# Altium PCB Telemetry_System.PcbDoc
Units mm, origin at the board's own origin, x right, y up, seen from the top; angles counter-clockwise.
Board outline 80 x 80 mm, 4 copper layers (Ground, Power, Ground2, Power2), stack 0.603 mm thick; 68 components, 65 nets, 309 pads, 10 vias.
Unrouted connection lines stored in the file: 180.
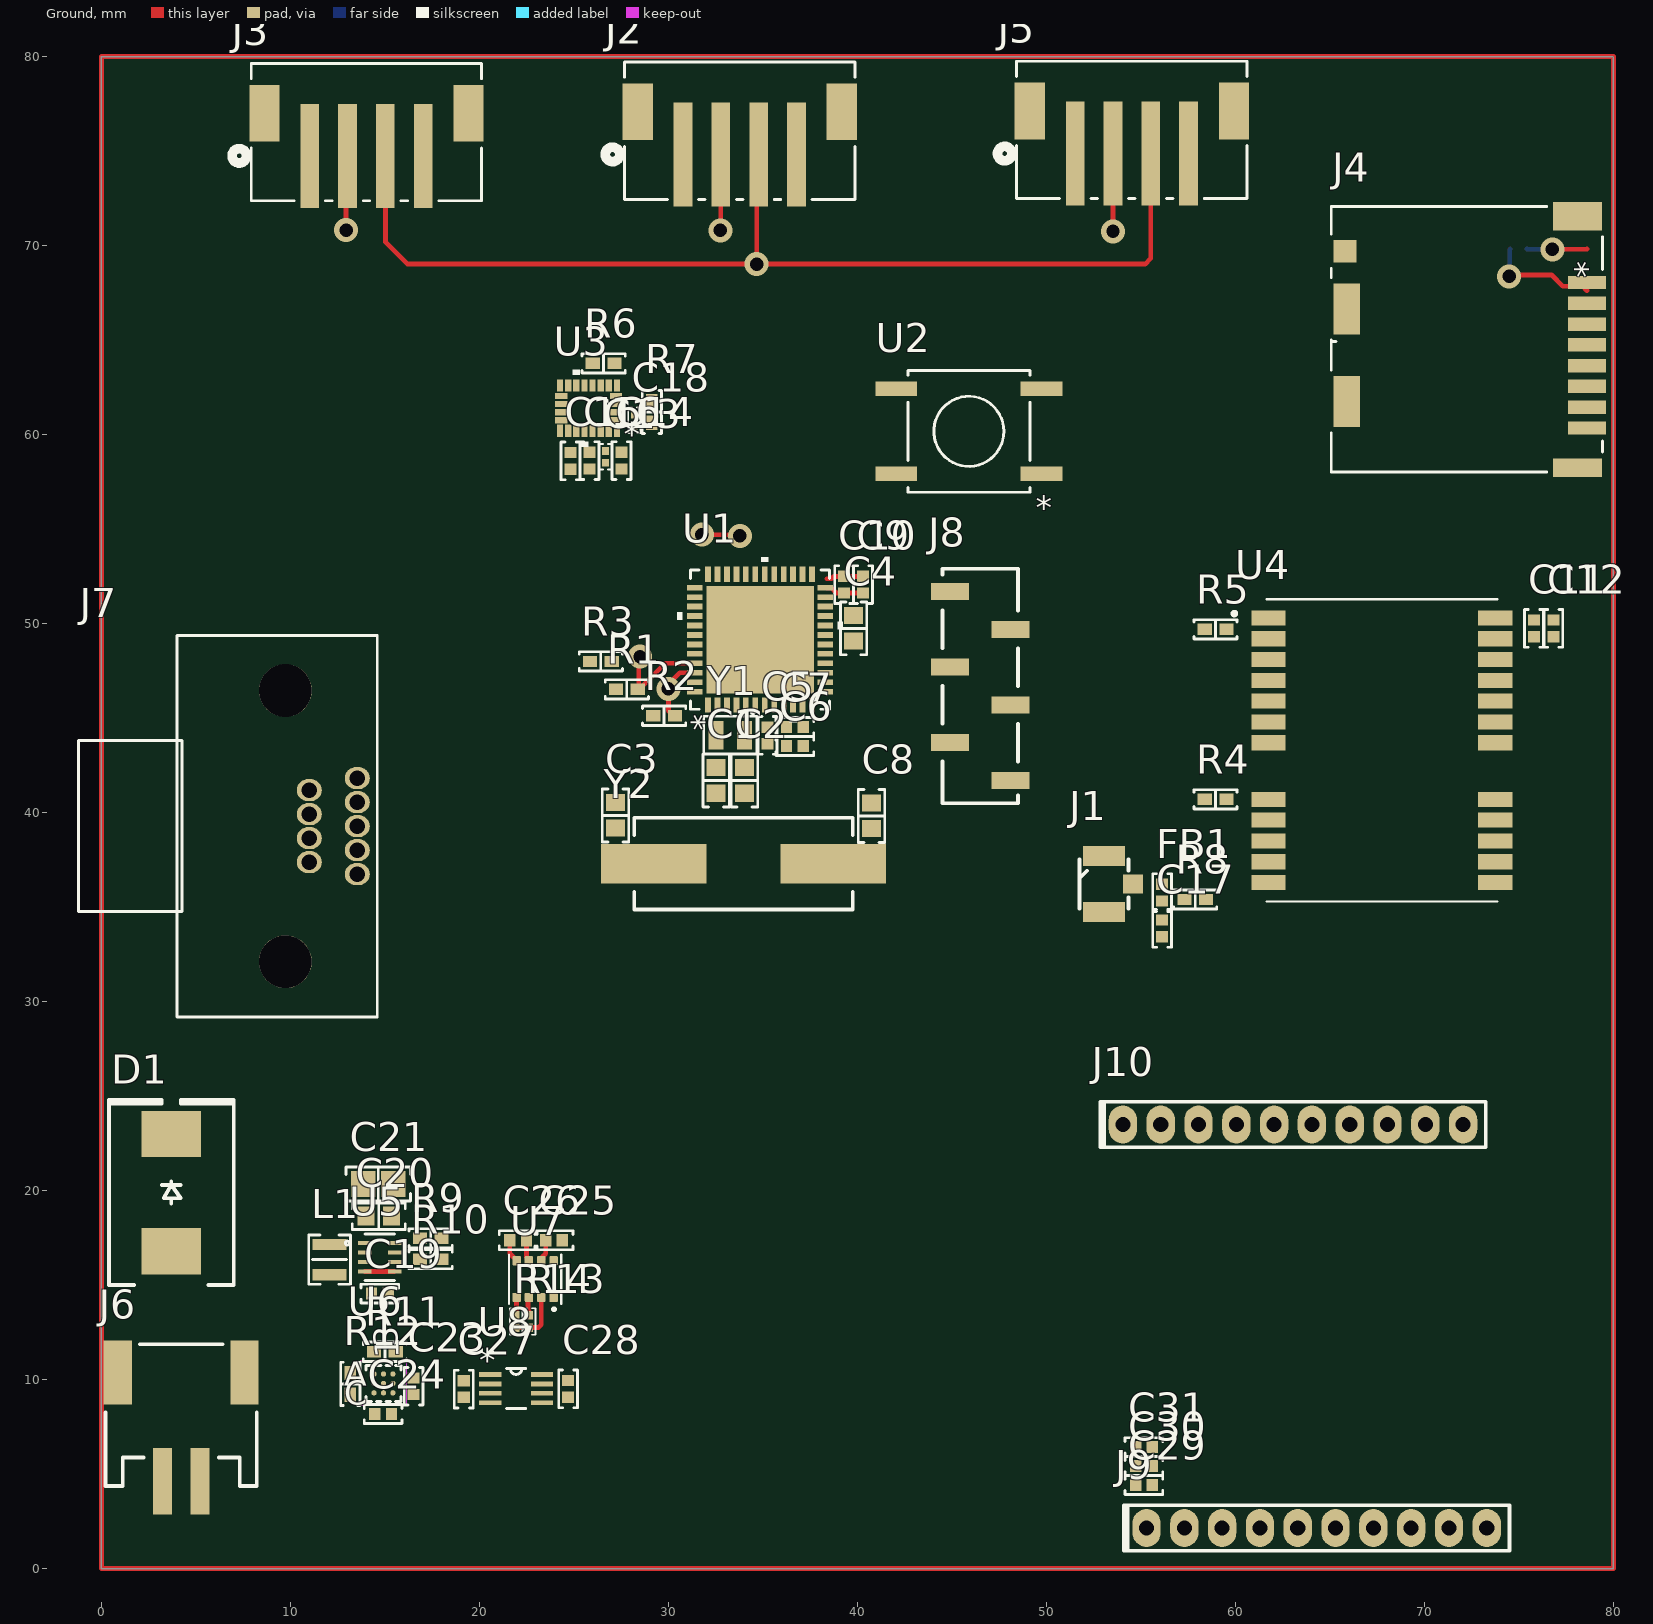
[diagram p0: Ground view]
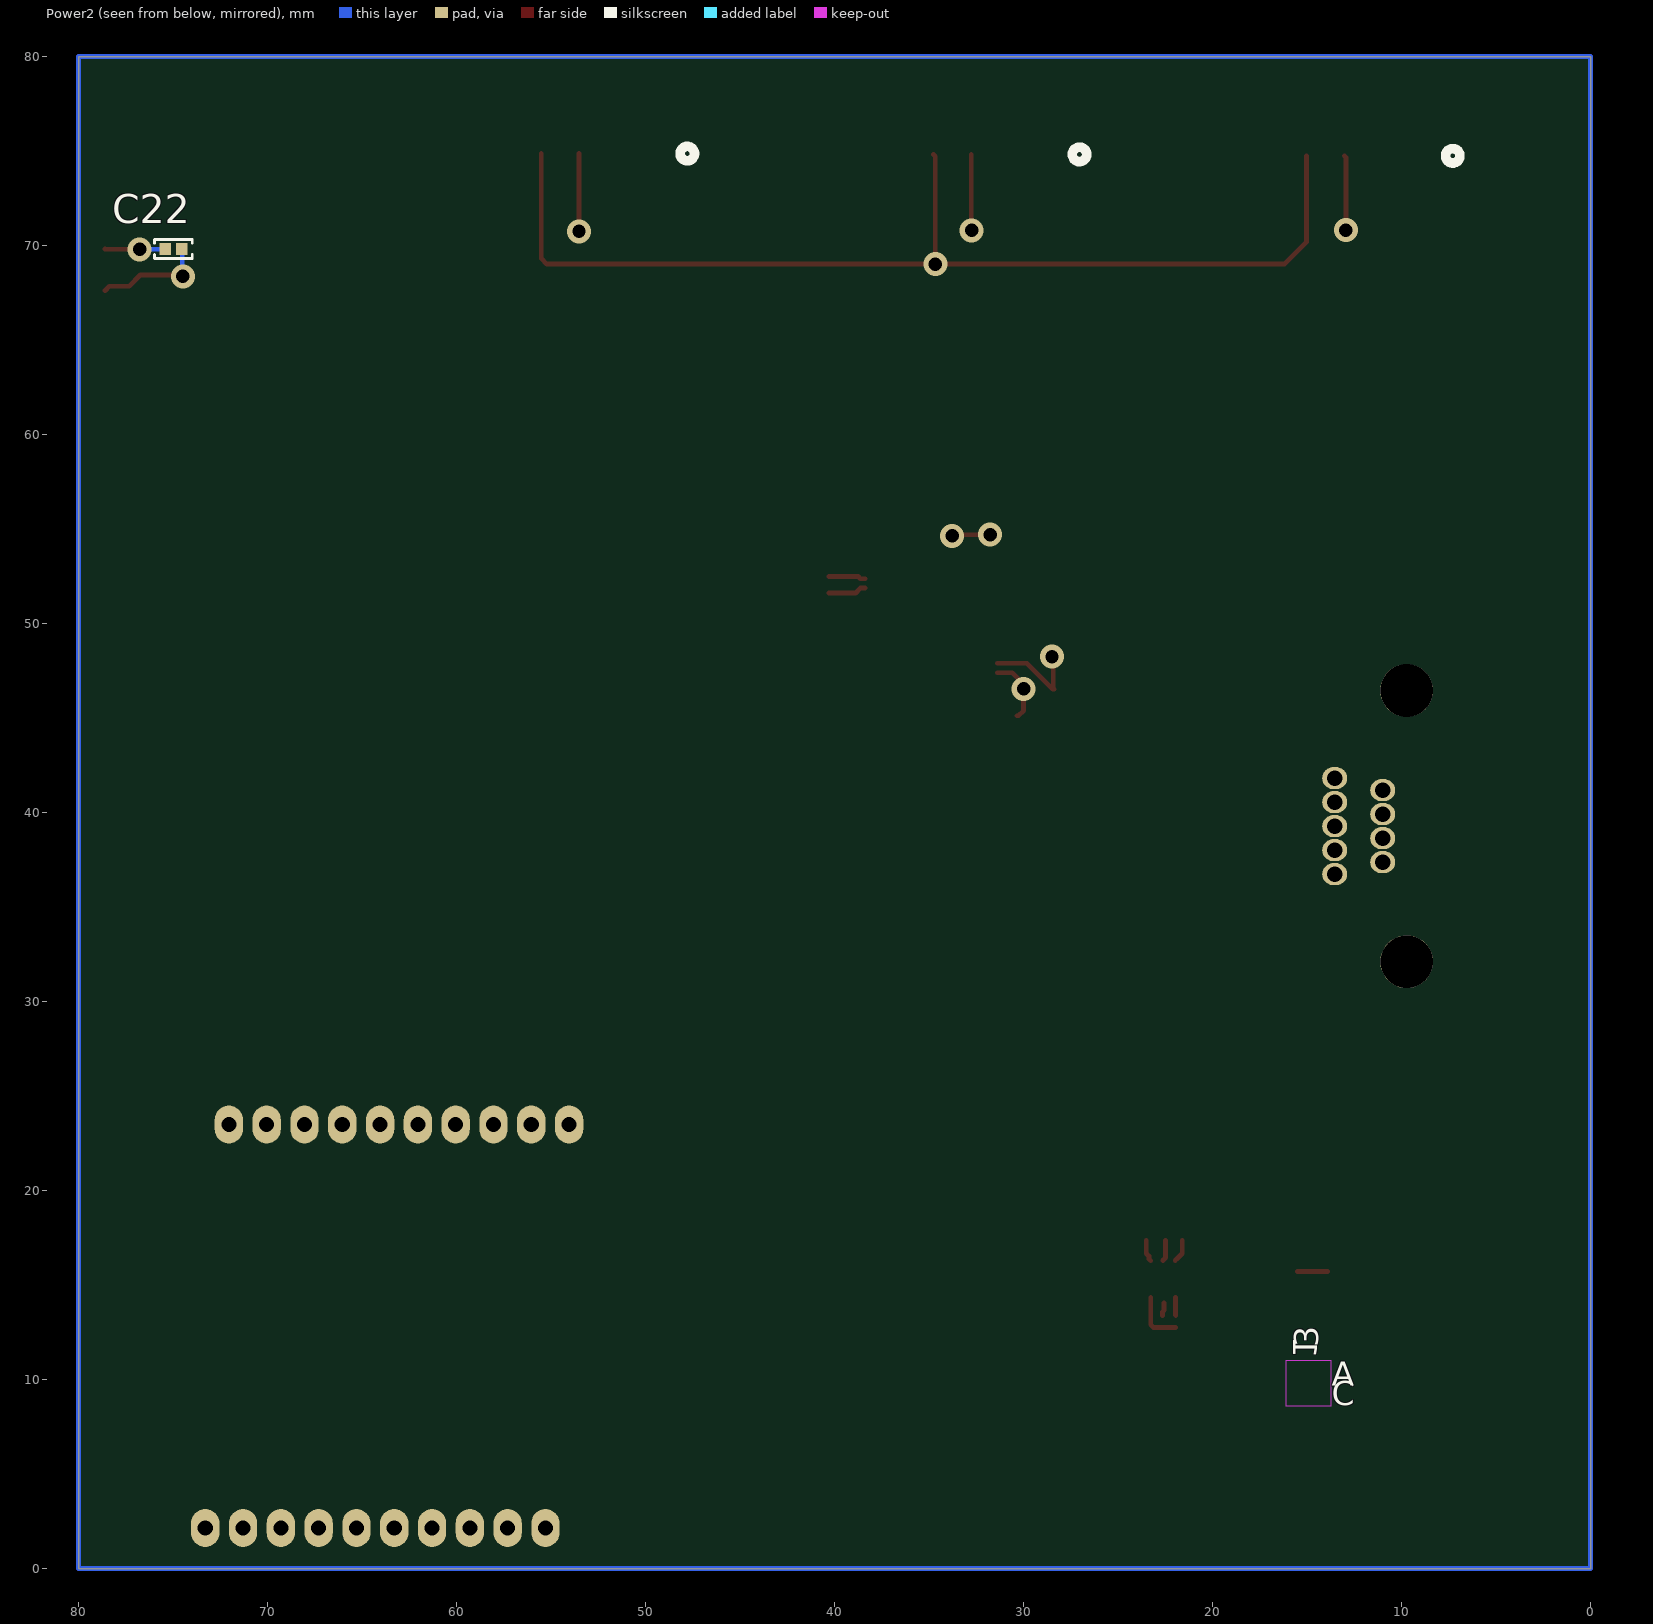
[diagram p1: Power2 view, seen from below]
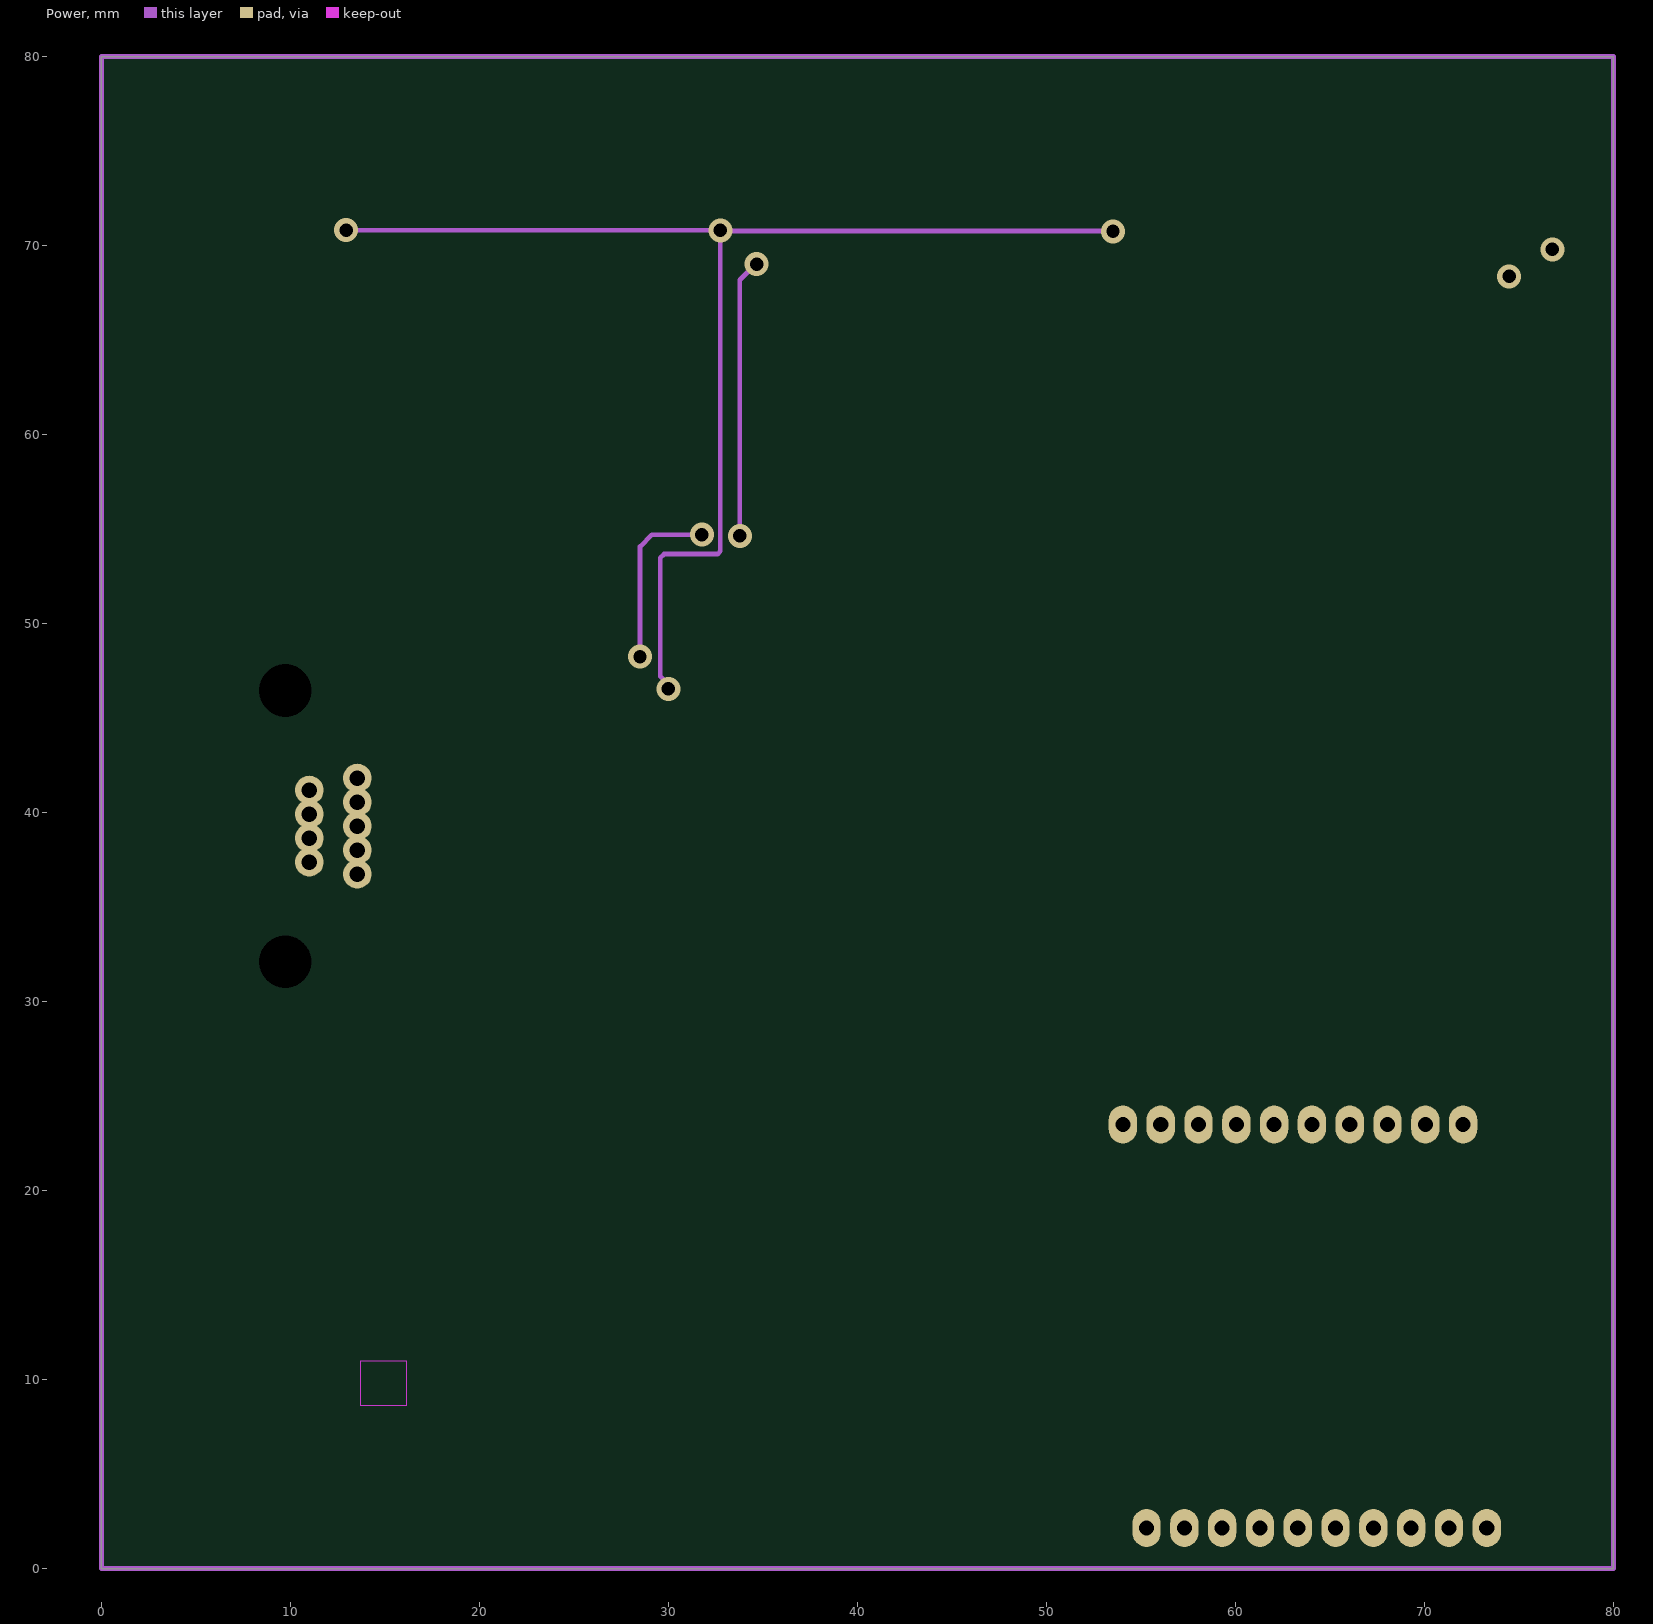
[diagram p2: Power]

## Layer stack, top to bottom
Top Solder: solder mask 0.0102, Solder Resist, Dk 3.5
Ground: signal copper 0.035
Dielectric 2: prepreg 0.0711, PP-006, Dk 4.1
Power: signal copper 0.0356
Dielectric 1: dielectric 0.32, FR-4, Dk 4.8
Ground2: signal copper 0.0356
Dielectric 3: prepreg 0.0711, PP-006, Dk 4.1
Power2: signal copper 0.035
Bottom Solder: solder mask 0.0102, Solder Resist, Dk 3.5

## Board outline
0,0 80,0 80,80 0,80

## Design rules (kind name [scope] priority, off if disabled: settings)
Clearance Clearance_1 [(ExistsOnLayer('Power') Or ExistsOnLayer('Ground2')) vs (ExistsOnLayer('Power') Or ExistsOnLayer('Ground2'))] p1: gap=0.01 ignorepadtopadclearanceinfootprint=FALSE sourcerule=37 cellrowname=All cellrowtype=0 cellcolname=All cellcoltype=0 innerlayers=TRUE
Clearance Clearance_2 [(ExistsOnLayer('Ground') Or ExistsOnLayer('Power2')) vs (ExistsOnLayer('Ground') Or ExistsOnLayer('Power2'))] p2: gap=0.01 ignorepadtopadclearanceinfootprint=FALSE sourcerule=37 cellrowname=All cellrowtype=0 cellcolname=All cellcoltype=0 outerlayers=TRUE
Clearance [All] p3: gap=0.254 ignorepadtopadclearanceinfootprint=FALSE ismatrix=TRUE
Creepage Creepage_1 [All] p1: checkdistance=0.01 applytopolygonpour=TRUE
PolygonConnect [All] p1: connectstyle=Relief reliefconductorwidth=0.254 reliefentries=4 polygonreliefangle="90 Angle" airgapwidth=0.254
RoutingVias [All] p1: holewidth=0.711 width=1.27 viastyle="Through Hole" minholewidth=0.711 minwidth=1.27 maxholewidth=0.711 maxwidth=1.27
SolderMaskExpansion [All] p1: expansion=0.102 istentingtop=FALSE
Width [All] p1: maxlimit=0.254 minlimit=0.254 preferedwidth=0.254
30 further rules are at their usual default settings.

## Classes and differential pairs
component class U_Peripherals: C11 C12 C13 C14 C15 C16 C17 C18 C19 C20 C21 C22 C23 C24 C25 C26 C27 C28 C29 C30 C31 D1 FB1 J1 J2 J3 J4 J5 J6 J7 J8 J9 J10 L1 R4 R5 R6 R7 R8 R9 R10 R11 R12 R13 R14 U3 U4 U5 U6 U7 U8
component class Telemetry_System: C1 C2 C3 C4 C5 C6 C7 C8 C9 C10 R1 R2 R3 U1 U2 Y1 Y2

## Components (designator, comment, footprint, x,y, rotation, side; value= is the part's Value field where it differs from the comment)
C1 "5 pF" "CAP 0603_1608" 32.525,41.7 r90 top
C2 "5 pF" "CAP 0603_1608" 34.025,41.7 r90 top
C3 "16 pF" "CAP 0603_1608" 27.2,39.85 r270 top
C4 "4.7 µF" "CAP 0603_1608" 39.8,49.75 r90 top
C5 "0.1 µF" "CAP 0402_1005" 35.25,44.085 r90 top
C6 "1 µF" "CAP 0402_1005" 36.69,43.525 r180 top
C7 "0.1 µF" "CAP 0402_1005" 36.69,44.525 r180 top
C8 "16 pF" "CAP 0603_1608" 40.75,39.825 r270 top
C9 "1 µF" "CAP 0402_1005" 40.3,52.06 r90 top
C10 "0.1 µF" "CAP 0402_1005" 39.3,52.06 r90 top
C11 "0.1 µF" "CAP 0402_1005" 75.8,49.75 r90 top
C12 "1 µF" "CAP 0402_1005" 76.825,49.75 r270 top
C13 "0.1 µF" "CAP 0201_0603" 26.675,58.825 r90 top
C14 "0.1 µF" "CAP 0402_1005" 27.525,58.625 r270 top
C15 "10000 pF" "CAP 0402_1005" 24.825,58.61 r90 top
C16 "10 µF" "CAP 0402_1005" 25.825,58.625 r90 top
C17 "47 pF" "CAP 0402_1005" 56.125,33.875 r90 top
C18 "0.1 µF" "CAP 0201_0603" 28.2,60.75 r90 top
C19 "22 µF" "CAP 0402_1005" 14.735,14.55 r180 top
C20 "4.7 µF" "CAP 0603_1608" 14.675,18.65 r180 top
C21 "47 µF" "CAP 0805_2012" 14.65,20.35 r180 top
C22 "0.1 µF" "CAP 0402_1005" 74.985,69.825 r0 bottom
C23 "2.2 µF" "CAP 0402_1005" 16.525,9.65 r90 top
C24 "1 µF" "CAP 0402_1005" 14.91,8.175 r0 top
C25 "0.1 µF" "CAP 0402_1005" 23.95,17.375 r0 top
C26 "0.1 µF" "CAP 0402_1005" 22.05,17.375 r0 top
C27 "0.1 µF" "CAP 0402_1005" 19.172,9.5 r90 top
C28 "0.1 µF" "CAP 0402_1005" 24.697,9.515 r270 top
C29 "47 pF" "CAP 0402_1005" 55.16,4.425 r180 top
C30 "1 µF" "CAP 0402_1005" 55.16,5.425 r180 top
C31 "10 µF" "CAP 0402_1005" 55.16,6.425 r180 top
D1 "B520C-13-F" "DO214AB SMC" 3.7,19.9 r90 top
FB1 "30 Ohms @ 100 MHz" "FER 0402_1005" 56.125,35.765 r90 top
J1 "1909763-1" "TE C-1909763" 53.05,36.225 r90 top
J2 "J_B4B-PH-SM4-TB" CONN_B4B-PH-SM4-TB_JST 33.775,76.08 r180 top
J3 "J_B4B-PH-SM4-TB" CONN_B4B-PH-SM4-TB_JST 14.025,76.005 r180 top
J4 "J_DM3CS-SF" DM3CS-SF_HIR 72.25,65.05 r90 top
J5 "J_B4B-PH-SM4-TB" CONN_B4B-PH-SM4-TB_JST 54.525,76.125 r180 top
J6 "S2B-PH-SM4-TB(LF)(SN)" "JST S2B-PH-SM4-TB" 4.225,8.875 r0 top
J7 "J_581-M09-213L462" CONN_581-M09-213L462_NRC 4.13,39.285 r90 top
J8 "NPPN061BFLD-RC" "SULLINS NPPN061BFLD-RC" 46.5,46.7 r90 top
J9 "NPPN101BFCN-RC" "SULLINS NPPN101BFCN" 64.3,2.15 r0 top locked
J10 "NPPN101BFCN-RC" "SULLINS NPPN101BFCN" 63.05,23.5 r0 top locked
L1 "1 µH" "IND 0806_2016" 12.075,16.35 r90 top
R1 "10k" "RES 0402_1005" 27.8,46.525 r0 top
R2 "10k" "RES 0402_1005" 29.775,45.125 r0 top
R3 "10k" "RES 0402_1005" 26.425,48 r180 top
R4 "10k" "RES 0402_1005" 58.95,40.7 r0 top
R5 "10k" "RES 0402_1005" 58.95,49.7 r0 top
R6 "10k" "RES 0402_1005" 26.575,63.775 r0 top
R7 "10k" "RES 0402_1005" 29.125,61.2 r90 top
R8 "10 Ohms" "RES 0402_1005" 57.875,35.4 r0 top
R9 "511 kOhms" "RES 0402_1005" 17.425,17.475 r0 top
R10 "91 kOhms" "RES 0402_1005" 17.425,16.375 r180 top
R11 "10k" "RES 0402_1005" 15,11.475 r0 top
R12 "10k" "RES 0402_1005" 13.175,9.775 r90 top
R13 "4.7k" "RES 0201_0603" 22.65,13.075 r270 top
R14 "4.7k" "RES 0201_0603" 21.95,13.075 r270 top
U1 "U_STM32F411CEU6" UFQFPN-48_7X7X0P55MM 34.85,49.15 r90 top
U2 "U_430182043816" SOIC_82043816_WRE 45.9,60.175 r180 top
U3 "U_LSM9DS1TR" LGA-24_3X3P5X1_STM 25.775,61.4 r180 top
U4 "NEO-M9N-00B" XCVR_NEO-M9N-00B 67.75,43.3 r0 top
U5 "TPS631000DRLR" TPS631000DRLR_TEX 14.725,16.475 r0 top
U6 "U_BQ27427YZFR" DSBGA9-YZF_TEX 14.925,9.8 r0 top
U7 "U_BME280" BME280 22.95,15.32 r270 top
U8 "U_TCA9406DCUR" DCU8 21.947,9.525 r0 top
Y1 "32.768 kHz" "MICRO CRYSTAL CM8V H0.6mm" 33.275,44.1 r180 top
Y2 "25 MHz" "ABRACON ABLS" 33.975,37.3 r180 top

## Footprints (in the part's own frame and the unit in brackets; to place one, negate y for a bottom-side part, rotate by r counter-clockwise, add the part's x,y. Pads: shape width x height; smd on the part's side, far side on the other; paste and mask are expansions set on the pad)
"ABRACON ABLS" [mm] "Crystal, 2-Leads, Body 4.70x11.40mm, Pitch 8.80mm, IPC Medium Density"
  rect 5.6x2.1 smd: 1(-4.75,0) 2(4.75,0)
  silkscreen extent -5.77,-2.43 5.77,2.43, body extent -6.35,-2.35 6.35,2.35, height 4.2
BME280 [mm]
  rrect25% 0.49x0.45 smd: 1(0.97,0.975) 2(0.97,0.325) 3(0.97,-0.325) 4(0.97,-0.975) 5(-0.97,-0.975) 6(-0.97,-0.325) 7(-0.97,0.325) 8(-0.97,0.975)
  silkscreen extent -1.3,-1.39 1.65,1.39
"CAP 0201_0603" [mm] "Chip Capacitor, 2-Leads, Body 0.60x0.30mm, IPC Medium Density"
  rect 0.4x0.35 smd: 1(-0.31,0) 2(0.31,0)
  silkscreen extent -0.67,-0.33 0.67,0.33, body extent -0.3,-0.15 0.3,0.15, height 0.3
"CAP 0402_1005" [mm] "Chip Capacitor, 2-Leads, Body 1.02x0.51mm, IPC Medium Density"
  rect 0.6x0.64 smd: 1(-0.44,0) 2(0.44,0)
  silkscreen extent -1,-0.5 1,0.5, body extent -0.5,-0.26 0.5,0.26, height 0.52
"CAP 0603_1608" [mm] "Chip Capacitor, 2-Leads, Body 1.60x0.80mm, IPC Medium Density"
  rect 0.9x1 smd: 1(-0.675,0) 2(0.675,0)
  silkscreen extent -1.4,-0.7 1.4,0.7, body extent -0.8,-0.41 0.8,0.41, height 0.82
"CAP 0805_2012" [mm] "Chip Capacitor, 2-Leads, Body 2.00x1.20mm, IPC Medium Density"
  rect 1.3x1.4 smd: 1(-0.8,0) 2(0.8,0)
  silkscreen extent -1.7,-0.9 1.7,0.9, body extent -1,-0.64 1,0.64, height 1.26
CONN_581-M09-213L462_NRC [mil]
  oval 46x52 / inner round 60 / far side oval 46x52 hole 32 paste-99999 mask+0: 1(-100,-370.47) 2(-50,-370.47) 3(0,-370.47) 4(50,-370.47) 5(100,-370.47) 6(-75,-270.47) 7(-25,-270.47) 8(25,-270.47) 9(75,-270.47)
  round 110 / inner round 60 / far side round 110 hole 110 unplated paste-99999 mask-55: 10(-282.48,-220.47) 11(282.48,-220.47)
  silkscreen extent -398,-412 398,210, body extent -393,-438 393,174, height 307
CONN_B4B-PH-SM4-TB_JST [mil]
  rect 39x217 smd paste+0 mask+0: 1(118.11,49.42) 2(39.37,49.42) 3(-39.37,49.42) 4(-118.11,49.42)
  rect 63x118 smd paste-59 mask-59: 5(-212.6,-39.17) 6(212.6,-39.17)
  silkscreen extent -240,-143 280,143, body extent -243,-128 228,148, height 266
DCU8 [mil]
  rect 46x10 smd paste-23 mask-23: 1(-54,29.53) 2(-54,9.84) 3(-54,-9.84) 4(-54,-29.53) 5(54,-29.53) 6(54,-9.84) 7(54,9.84) 8(54,29.53)
  silkscreen extent -20,-42 20,42, body extent -63,-41 63,41, height 35
DM3CS-SF_HIR [mil]
  rect 28x79 smd paste+0 mask+0: 1(118.11,-250.06) 2(74.8,-250.06) 3(31.5,-250.06) 4(-11.81,-250.06) 5(-55.12,-250.06) 6(-98.43,-250.06) 7(-141.73,-250.06) 8(-185.04,-250.06)
  rect 106x55 smd paste+0 mask+0: 9(62.99,249.94) 11(-129.92,249.94)
  rect 39x102 smd paste+0 mask+0: 10(-267.72,-230.37)
  rect 47x47 smd paste+0 mask+0: 12(183.07,253.88)
  rect 59x102 smd paste-51 mask-51: 13(255.91,-230.37)
  silkscreen extent -276,-282 276,282, body extent -272,-283 272,273, height 84
"DO214AB SMC" [mm] "Molded Diode, 2-Leads, Body 6.85x5.90mm, IPC Medium Density"
  rect 2.45x3.15 smd: 1(-3.1,0) 2(3.1,0)
  silkscreen extent -4.9,-3.3 4.9,3.3, body extent -3.97,-2.95 3.97,2.95, height 2.6
DSBGA9-YZF_TEX [mil]
  round 11 smd paste+0 mask+0: A1(-19.69,19.69) A2(0,19.69) A3(19.69,19.69) B1(-19.69,0) B2(0,0) B3(19.69,0) C1(-19.69,-19.69) C2(0,-19.69) C3(19.69,-19.69)
  Keep-Out Layer region: -47.04,-47.04 -47.04,47.03 47.03,47.03 47.03,-47.04
  silkscreen extent -36,-38 36,38, body extent -31,-33 31,33, height 25
"FER 0402_1005" [mm] "Chip Ferrite, 2-Leads, Body 1.02x0.51mm, IPC Medium Density"
  rect 0.6x0.64 smd: 1(-0.44,0) 2(0.44,0)
  silkscreen extent -1,-0.5 1,0.5, body extent -0.5,-0.26 0.5,0.26, height 0.52
"IND 0806_2016" [mm] "Chip Capacitor, 2-Leads, Body 2.00x1.20mm, IPC Medium Density"
  rect 0.6x1.8 smd: 1(-0.8,0) 2(0.8,0)
  silkscreen extent -1.3,-1.1 1.3,1.1, body extent -1.01,-0.91 1.01,0.91, height 1.81
"JST S2B-PH-SM4-TB" [mm] "JST PH Series 2mm pitch, side entry connector"
  rect 1x3.5 smd: 1(-1,-4.25) 2(1,-4.25)
  rect 1.5x3.4 smd: M(-3.35,1.5) M(3.35,1.5)
  silkscreen extent -4,-4.5 4,3, body extent -3.95,-5.6 3.95,3.01, height 5.6
LGA-24_3X3P5X1_STM [mm]
  rect 0.331x0.654 smd paste-0.065 mask+0.051: 1(-1.505,1.2) 6(-1.505,-1.2) 7(-1.075,-1.2) 8(-0.645,-1.2) 9(-0.215,-1.2) 10(0.215,-1.2) 11(0.645,-1.2) 12(1.075,-1.2) 13(1.505,-1.2) 18(1.505,1.2) 19(1.075,1.2) 20(0.645,1.2) 21(0.215,1.2) 22(-0.215,1.2) 23(-0.645,1.2) 24(-1.075,1.2)
  rect 0.654x0.331 smd paste-0.065 mask+0.051: 2(-1.45,0.645) 3(-1.45,0.215) 4(-1.45,-0.215) 5(-1.45,-0.645) 14(1.45,-0.645) 15(1.45,-0.215) 16(1.45,0.215) 17(1.45,0.645)
  silkscreen extent 0.02,-2.03 0.84,2.03, body extent -1.75,-1.5 1.75,1.5, height 1.65
"MICRO CRYSTAL CM8V H0.6mm" [mm] "SMD Crystal 2.0 x 1.2 x 0.6mm"
  rect 0.8x1.5 smd: 1(-0.75,0) 2(0.75,0)
  silkscreen extent -1.4,-1.25 1.4,1, body extent -1,-0.6 1,0.6, height 0.6
"RES 0201_0603" [mm] "Chip Resistor, 2-Leads, Body 0.60x0.30mm, IPC Medium Density"
  rect 0.44x0.35 smd: 1(-0.325,0) 2(0.325,0)
  silkscreen extent -0.7,-0.33 0.7,0.33, body extent -0.3,-0.15 0.3,0.15, height 0.21
"RES 0402_1005" [mm] "Chip Resistor, 2-Leads, Body 1.0x0.5mm, IPC Medium Density"
  rect 0.75x0.6 smd: 1(-0.575,0) 2(0.575,0)
  silkscreen extent -1.14,-0.51 1.14,0.51, body extent -0.5,-0.25 0.5,0.25, height 0.35
SOIC_82043816_WRE [mil]
  rect 87x30 smd paste+0 mask+0: 1(-151.5,88.58) 2(-151.5,-88.58) 3(151.5,-88.58) 4(151.5,88.58)
  silkscreen extent -127,-127 127,127, body extent -182,-122 172,122, height 169
"SULLINS NPPN061BFLD-RC" [mm] "6 Position Header Connector 0.079\" (2.00mm) Surface Mount Gold"
  rect 0.9x2 smd: 1(-5,-1.6) 2(-3,1.6) 3(-1,-1.6) 4(1,1.6) 5(3,-1.6) 6(5,1.6)
  silkscreen extent -6.2,-2 6.2,2, body extent -6.25,-2 6.25,2, height 4.6
"SULLINS NPPN101BFCN" [mm]
  oval 1.5x2 hole 0.8: 1(-9,0) 2(-7,0) 3(-5,0) 4(-3,0) 5(-1,0) 6(1,0) 7(3,0) 8(5,0) 9(7,0) 10(9,0)
  silkscreen extent -10.2,-1.2 10.2,1.2, body extent -10.25,-1.2 10.25,1.2, height 4.41
"TE C-1909763" [mm]
  rect 1.05x2.2 smd: G(-1.475,0) G(1.475,0)
  rect 1x1.05 smd: S(0,-1.525)
  silkscreen extent -1.3,-1.3 1.3,1.3, body extent -1.5,-1.55 1.5,1.55, height 1.23
TPS631000DRLR_TEX [mil]
  rect 28x9 smd paste+0 mask+0: 1(-31.5,29.53) 2(-31.5,9.84) 3(-31.5,-9.84) 4(-31.5,-29.53) 5(31.5,-29.53) 6(31.5,-9.84) 7(31.5,9.84) 8(31.5,29.53)
  silkscreen extent -71,-48 30,48, body extent -34,-44 34,44, height 27
UFQFPN-48_7X7X0P55MM [mil]
  rect 32x12 smd paste+0 mask+0: 1(-136,108.27) 2(-136,88.58) 3(-136,68.9) 4(-136,49.21) 5(-136,29.53) 6(-136,9.84) 7(-136,-9.84) 8(-136,-29.53) 9(-136,-49.21) 10(-136,-68.9) 11(-136,-88.58) 12(-136,-108.27) 25(136,-108.27) 26(136,-88.58) 27(136,-68.9) 28(136,-49.21) 29(136,-29.53) 30(136,-9.84) 31(136,9.84) 32(136,29.53) 33(136,49.21) 34(136,68.9) 35(136,88.58) 36(136,108.27)
  rect 12x32 smd paste+0 mask+0: 13(-108.27,-136) 14(-88.58,-136) 15(-68.9,-136) 16(-49.21,-136) 17(-29.53,-136) 18(-9.84,-136) 19(9.84,-136) 20(29.53,-136) 21(49.21,-136) 22(68.9,-136) 23(88.58,-136) 24(108.27,-136) 37(108.27,136) 38(88.58,136) 39(68.9,136) 40(49.21,136) 41(29.53,136) 42(9.84,136) 43(-9.84,136) 44(-29.53,136) 45(-49.21,136) 46(-68.9,136) 47(-88.58,136) 48(-108.27,136)
  rect 224x224 smd paste-112 mask+0: 49(0,0)
  silkscreen extent -172,-172 172,172, body extent -140,-141 140,139, height 24
XCVR_NEO-M9N-00B [mm]
  rect 1.8x0.8 smd paste-2: 1(-6,7) 2(-6,5.9) 3(-6,4.8) 4(-6,3.7) 5(-6,2.6) 6(-6,1.5) 7(-6,0.4) 8(-6,-2.6) 9(-6,-3.7) 10(-6,-4.8) 11(-6,-5.9) 12(-6,-7) 13(6,-7) 14(6,-5.9) 15(6,-4.8) 16(6,-3.7) 17(6,-2.6) 18(6,0.4) 19(6,1.5) 20(6,2.6) 21(6,3.7) 22(6,4.8) 23(6,5.9) 24(6,7)
  silkscreen extent -7.9,-8 6.1,8, body extent -5.97,-8 6.23,8, height 2.6

## Part data
C1 C2: library part CGA3E2C0G1H050C080AD, "CAP CER 5PF 50V 0603 EPOXY", Device Package="0603 (1608 Metric)", manufacturer="TDK Corporation", Operating Temperature="-55°C ~ 125°C", Ratings=AEC-Q200, Supplier Part Number 1=445-9797-1-ND, Temperature Coefficient="C0G, NP0", Tolerance=±0.25pF, Voltage - Rated=50V, Applications=Automotive, Capacitance="5 pF", ComponentLink1Description=Datasheet, ComponentLink1URL=https://product.tdk.com/info/en/catalog/datasheets/mlcc_automotive_epoxy_en.pdf?ref_disty=digikey, ComponentLink2Description="DigiKey Link", ComponentLink2URL=https://www.digikey.com/en/products/detail/tdk-corporation/CGA3E2C0G1H050C080AD/3933530, Features="Epoxy Mountable", lastupdated="9/02/2024 8:10:25 PM", Lifecycle Status=Active, Minimum Order=1, Mounting Type="Surface Mount, MLCC, Epoxy", Package / Case="0603 (1608 Metric)", packaging=TapeAndReel, Part Number=CGA3E2C0G1H050C080AD, Part Status=Active, partid=6295, price=0.02, series=CGA, Size / Dimension="0.063\" L x 0.031\" W (1.60mm x 0.80mm)", Supplier 1=DigiKey, Thickness (Max)="0.037\" (0.95mm)"
C3 C8: library part C0603C160K3GAC7867, "CAP CER 16PF 25V C0G/NP0 0603", Device Package="0603 (1608 Metric)", manufacturer=KEMET, Operating Temperature="-55°C ~ 125°C", Supplier Part Number 1=399-C0603C160K3GAC7867CT-ND, Temperature Coefficient="C0G, NP0", Tolerance=±10%, Voltage - Rated=25V, Applications="General Purpose", Capacitance="16 pF", ComponentLink1Description=Datasheet, ComponentLink1URL=https://api.kemet.com/component-edge/download/datasheet/C0603C160K3GAC7867.pdf, ComponentLink2Description="DigiKey Link", ComponentLink2URL=https://www.digikey.com/en/products/detail/kemet/C0603C160K3GAC7867/12701360, Features="Low ESL", lastupdated="9/02/2024 8:09:58 PM", Lifecycle Status=Active, Minimum Order=1, Mounting Type="Surface Mount, MLCC", Package / Case="0603 (1608 Metric)", packaging=TapeAndReel, Part Number=C0603C160K3GAC7867, Part Status=Active, partid=35523, price=0.04, series="SMD Comm C0G", Size / Dimension="0.063\" L x 0.031\" W (1.60mm x 0.80mm)", Supplier 1=DigiKey, Thickness (Max)="0.034\" (0.87mm)"
C4 C20: library part GRM185C80J475ME11D, "CAP CER 4.7UF 6.3V X6S 0603", Device Package="0603 (1608 Metric)", manufacturer="Murata Electronics", Operating Temperature="-55°C ~ 105°C", Supplier Part Number 1=490-18660-1-ND, Temperature Coefficient=X6S, Tolerance=±20%, Voltage - Rated=6.3V, Applications="General Purpose", Capacitance="4.7 µF", ComponentLink1Description=Datasheet, ComponentLink1URL=https://search.murata.co.jp/Ceramy/image/img/A01X/G101/ENG/GRM185C80J475ME11-01A.pdf, ComponentLink2Description="DigiKey Link", ComponentLink2URL=https://www.digikey.com/en/products/detail/murata-electronics/GRM185C80J475ME11D/10326313, lastupdated="9/02/2024 8:10:28 PM", Lifecycle Status=Active, Minimum Order=1, Mounting Type="Surface Mount, MLCC", Package / Case="0603 (1608 Metric)", packaging=TapeAndReel, Part Number=GRM185C80J475ME11D, Part Status=Active, partid=3976, price=0.03, series=GRM, Size / Dimension="0.063\" L x 0.031\" W (1.60mm x 0.80mm)", Supplier 1=DigiKey, Thickness (Max)="0.022\" (0.55mm)"
C5 C7 C10 C11 C14 C22 C25 C26 C27 C28: library part CL05B104KP5VPNC, "CAP CER 100NF 10V X7R 0402", Device Package="0402 (1005 Metric)", manufacturer="Samsung Electro-Mechanics", Operating Temperature="-55°C ~ 125°C", Ratings=AEC-Q200, Supplier Part Number 1=1276-CL05B104KP5VPNCCT-ND, Temperature Coefficient=X7R, Tolerance=±10%, Voltage - Rated=10V, Applications=Automotive, Capacitance="0.1 µF", ComponentLink1Description=Datasheet, ComponentLink1URL=https://mm.digikey.com/Volume0/opasdata/d220001/medias/docus/5458/CL05B104KP5VPNC_Spec.pdf, ComponentLink2Description="DigiKey Link", ComponentLink2URL=https://www.digikey.com/en/products/detail/samsung-electro-mechanics/CL05B104KP5VPNC/20498482, lastupdated="9/02/2024 8:03:17 PM", Lifecycle Status=Active, Minimum Order=1, Mounting Type="Surface Mount, MLCC", Package / Case="0402 (1005 Metric)", packaging=TapeAndReel, Part Number=CL05B104KP5VPNC, partid=56690, price=0.01, series=CL, Size / Dimension="0.039\" L x 0.020\" W (1.00mm x 0.50mm)", Supplier 1=DigiKey, Thickness (Max)="0.022\" (0.55mm)"
C6 C9 C12 C24 C30: library part KGM05AR50G105KH, "CAP CER 1UF 4V X5R 0402", Device Package="0402 (1005 Metric)", manufacturer="KYOCERA AVX", Operating Temperature="-55°C ~ 85°C", Supplier Part Number 1=478-KGM05AR50G105KHCT-ND, Temperature Coefficient=X5R, Tolerance=±10%, Voltage - Rated=4V, Applications="General Purpose", Capacitance="1 µF", ComponentLink1Description=Datasheet, ComponentLink1URL=https://datasheets.kyocera-avx.com/cx5r.pdf, ComponentLink2Description="DigiKey Link", ComponentLink2URL=https://www.digikey.com/en/products/detail/kyocera-avx/KGM05AR50G105KH/3079858, lastupdated="9/02/2024 8:03:45 PM", Lifecycle Status=Active, Minimum Order=1, Mounting Type="Surface Mount, MLCC", Package / Case="0402 (1005 Metric)", packaging=TapeAndReel, Part Number=KGM05AR50G105KH, Part Status=Active, partid=51052, price=0.07, series="KGM - X5R", Size / Dimension="0.039\" L x 0.020\" W (1.00mm x 0.50mm)", Supplier 1=DigiKey, Thickness (Max)="0.022\" (0.55mm)"
C13 C18: library part 02016C104KAT2A, "0201 6.3V X7R 100NF 10%", Device Package="0201 (0603 Metric)", manufacturer="KYOCERA AVX", Operating Temperature="-55°C ~ 125°C", Supplier Part Number 1=478-02016C104KAT2ACT-ND, Temperature Coefficient=X7R, Tolerance=±10%, Voltage - Rated=6.3V, Applications="General Purpose", Capacitance="0.1 µF", ComponentLink1Description=Datasheet, ComponentLink1URL=https://datasheets.kyocera-avx.com/X7RDielectric.pdf, ComponentLink2Description="DigiKey Link", ComponentLink2URL=https://www.digikey.com/en/products/detail/kyocera-avx/02016C104KAT2A/17868582, lastupdated="11/03/2024 7:01:34 AM", Lifecycle Status=Active, Minimum Order=1, Mounting Type="Surface Mount, MLCC", Package / Case="0201 (0603 Metric)", packaging=TapeAndReel, Part Number=02016C104KAT2A, Part Status=Active, partid=47559, price=0.06, series=-, Size / Dimension="0.024\" L x 0.012\" W (0.60mm x 0.30mm)", Supplier 1=DigiKey, Thickness (Max)="0.013\" (0.33mm)"
C15: library part C0402C103K4REC7867, "CAP CER 0402 10NF 16V X7R 10%", Device Package="0402 (1005 Metric)", manufacturer=KEMET, Operating Temperature="-55°C ~ 125°C", Supplier Part Number 1=399-C0402C103K4REC7867CT-ND, Temperature Coefficient=X7R, Tolerance=±10%, Voltage - Rated=16V, Applications="ESD Protection", Capacitance="10000 pF", ComponentLink1Description=Datasheet, ComponentLink1URL=https://connect.kemet.com:7667/gateway/IntelliData-ComponentDocumentation/1.0/download/datasheet/C0402C103K4REC7867, ComponentLink2Description="DigiKey Link", ComponentLink2URL=https://www.digikey.com/en/products/detail/kemet/C0402C103K4REC7867/8643577, lastupdated="9/02/2024 8:03:43 PM", Lifecycle Status=Active, Minimum Order=1, Mounting Type="Surface Mount, MLCC", Package / Case="0402 (1005 Metric)", packaging=TapeAndReel, Part Number=C0402C103K4REC7867, Part Status=Active, partid=52124, price=0.01, series="ESD SMD Comm X7R", Size / Dimension="0.039\" L x 0.020\" W (1.00mm x 0.50mm)", Supplier 1=DigiKey, Thickness (Max)="0.022\" (0.55mm)"
C16: library part GRM155R60G106ME01D, "CAP CER 10UF 4V X5R 0402", Device Package="0402 (1005 Metric)", manufacturer="Murata Electronics", Operating Temperature="-55°C ~ 85°C", Supplier Part Number 1=490-GRM155R60G106ME01DCT-ND, Temperature Coefficient=X5R, Tolerance=±20%, Voltage - Rated=4V, Applications="General Purpose", Capacitance="10 µF", ComponentLink1Description=Datasheet, ComponentLink1URL=https://search.murata.co.jp/Ceramy/image/img/A01X/G101/ENG/GRM155R60G106ME01-01A.pdf, ComponentLink2Description="DigiKey Link", ComponentLink2URL=https://www.digikey.com/en/products/detail/murata-electronics/GRM155R60G106ME01D/13688572, lastupdated="9/02/2024 8:03:59 PM", Lifecycle Status=Active, Minimum Order=1, Mounting Type="Surface Mount, MLCC", Package / Case="0402 (1005 Metric)", packaging=TapeAndReel, Part Number=GRM155R60G106ME01D, Part Status=Active, partid=48095, price=0.01, series=GRM, Size / Dimension="0.039\" L x 0.020\" W (1.00mm x 0.50mm)", Supplier 1=DigiKey, Thickness (Max)="0.026\" (0.65mm)"
C17 C29: library part C0402C470J4GAC7867, "CAP CER 47PF 16V NP0 0402", Device Package="0402 (1005 Metric)", manufacturer=KEMET, Operating Temperature="-55°C ~ 125°C", Supplier Part Number 1=399-14453-1-ND, Temperature Coefficient="C0G, NP0", Tolerance=±5%, Voltage - Rated=16V, Applications="General Purpose", Capacitance="47 pF", ComponentLink1Description=Datasheet, ComponentLink1URL=https://api.kemet.com/component-edge/download/datasheet/C0402C470J4GACTU.pdf, ComponentLink2Description="DigiKey Link", ComponentLink2URL=https://www.digikey.com/en/products/detail/kemet/C0402C470J4GAC7867/2196712, Features="Low ESL", lastupdated="9/02/2024 8:04:38 PM", Lifecycle Status=Active, Minimum Order=1, Mounting Type="Surface Mount, MLCC", Package / Case="0402 (1005 Metric)", packaging=TapeAndReel, Part Number=C0402C470J4GAC7867, Part Status=Active, partid=1744, price=0.05, series="SMD Comm C0G", Size / Dimension="0.039\" L x 0.020\" W (1.00mm x 0.50mm)", Supplier 1=DigiKey, Thickness (Max)="0.022\" (0.55mm)"
C19: library part GRM158R61A226ME15D, "CAP CER 22UF 10V X5R 0402", Device Package="0402 (1005 Metric)", manufacturer="Murata Electronics", Operating Temperature="-55°C ~ 85°C", Supplier Part Number 1=490-GRM158R61A226ME15DCT-ND, Temperature Coefficient=X5R, Tolerance=±20%, Voltage - Rated=10V, Applications="General Purpose", Capacitance="22 µF", ComponentLink1Description=Datasheet, ComponentLink1URL=https://search.murata.co.jp/Ceramy/image/img/A01X/G101/ENG/GRM158R61A226ME15-01A.pdf, ComponentLink2Description="DigiKey Link", ComponentLink2URL=https://www.digikey.com/en/products/detail/murata-electronics/GRM158R61A226ME15D/16033379, lastupdated="9/02/2024 8:04:08 PM", Lifecycle Status=Active, Minimum Order=1, Mounting Type="Surface Mount, MLCC", Package / Case="0402 (1005 Metric)", packaging=TapeAndReel, Part Number=GRM158R61A226ME15D, Part Status=Active, partid=44973, price=0.08, series=GRM, Size / Dimension="0.039\" L x 0.020\" W (1.00mm x 0.50mm)", Supplier 1=DigiKey, Thickness (Max)="0.031\" (0.80mm)"
C21: library part AMK212BBJ476MD-T, "CAP CER 47UF 4V X5R 0805", Device Package="0805 (2012 Metric)", manufacturer="Taiyo Yuden", Operating Temperature="-55°C ~ 85°C", Supplier Part Number 1=587-5399-1-ND, Temperature Coefficient=X5R, Tolerance=±20%, Voltage - Rated=4V, Applications="SMPS Filtering", Capacitance="47 µF", ComponentLink1Description=Datasheet, ComponentLink1URL="https://ds.yuden.co.jp/TYCOMPAS/ut/detail?pn=AMK212BBJ476MD-T &u=M", ComponentLink2Description="DigiKey Link", ComponentLink2URL=https://www.digikey.com/en/products/detail/taiyo-yuden/AMK212BBJ476MD-T/7066986, lastupdated="9/02/2024 8:16:07 PM", Lifecycle Status=Active, Minimum Order=1, Mounting Type="Surface Mount, MLCC", Package / Case="0805 (2012 Metric)", packaging=TapeAndReel, Part Number=AMK212BBJ476MD-T, Part Status=Active, partid=3321, price=0.12, series=M, Size / Dimension="0.079\" L x 0.049\" W (2.00mm x 1.25mm)", Supplier 1=DigiKey, Thickness (Max)="0.037\" (0.95mm)"
C23: library part GRM155R6YA225KE11D, "CAP CER 2.2UF 35V X5R 0402", Device Package="0402 (1005 Metric)", manufacturer="Murata Electronics", Operating Temperature="-55°C ~ 85°C", Supplier Part Number 1=490-18212-1-ND, Temperature Coefficient=X5R, Tolerance=±10%, Voltage - Rated=35V, Applications="General Purpose", Capacitance="2.2 µF", ComponentLink1Description=Datasheet, ComponentLink1URL=https://search.murata.co.jp/Ceramy/image/img/A01X/G101/ENG/GRM155R6YA225KE11-01.pdf, ComponentLink2Description="DigiKey Link", ComponentLink2URL=https://www.digikey.com/en/products/detail/murata-electronics/GRM155R6YA225KE11D/9867920, lastupdated="9/02/2024 8:04:37 PM", Lifecycle Status=Active, Minimum Order=1, Mounting Type="Surface Mount, MLCC", Package / Case="0402 (1005 Metric)", packaging=TapeAndReel, Part Number=GRM155R6YA225KE11D, Part Status=Active, partid=1989, price=0.03, series=GRM, Size / Dimension="0.039\" L x 0.020\" W (1.00mm x 0.50mm)", Supplier 1=DigiKey, Thickness (Max)="0.028\" (0.70mm)"
C31: library part CL05A106MP8NUB8, "CAP CER 10UF 10V X5R 0402", Device Package="0402 (1005 Metric)", manufacturer="Samsung Electro-Mechanics", Operating Temperature="-55°C ~ 85°C", Supplier Part Number 1=1276-6830-1-ND, Temperature Coefficient=X5R, Tolerance=±20%, Voltage - Rated=10V, Applications="Acoustic Noise Reduction", Capacitance="10 µF", ComponentLink1Description=Datasheet, ComponentLink1URL=http://www.samsungsem.com/kr/support/product-search/mlcc/CL05A106MP8NUB8.jsp, ComponentLink2Description="DigiKey Link", ComponentLink2URL=https://www.digikey.com/en/products/detail/samsung-electro-mechanics/CL05A106MP8NUB8/5961314, lastupdated="9/02/2024 8:04:38 PM", Lifecycle Status=Active, Minimum Order=1, Mounting Type="Surface Mount, MLCC", Package / Case="0402 (1005 Metric)", packaging=TapeAndReel, Part Number=CL05A106MP8NUB8, Part Status=Active, partid=1758, price=0.06, series=CL, Size / Dimension="0.039\" L x 0.020\" W (1.00mm x 0.50mm)", Supplier 1=DigiKey, Thickness (Max)="0.035\" (0.90mm)"
D1: "DIODE SCHOTTKY 20V 5A SMC", Capacitance @ Vr, F="300pF @ 4V, 1MHz", Current - Average Rectified (Io)=5A, Current - Reverse Leakage @ Vr="500 µA @ 20 V", manufacturer="Diodes Incorporated", Operating Temperature - Junction="-55°C ~ 150°C", Package / Case="DO-214AB, SMC", Supplier Device Package=SMC, Supplier Part Number 1=B520C-FDICT-ND, Voltage - DC Reverse (Vr) (Max)="20 V", Voltage - Forward (Vf) (Max) @ If="550 mV @ 5 A", ComponentLink1Description=Datasheet, ComponentLink1URL=https://www.diodes.com/assets/Datasheets/ds13012.pdf, ComponentLink2Description="DigiKey Link", ComponentLink2URL=https://www.digikey.com/en/products/detail/diodes-incorporated/B520C-13-F/806535, Diode Type=Schottky, lastupdated="11/03/2024 7:45:58 AM", Lifecycle Status=Active, Minimum Order=1, Mounting Type="Surface Mount", packaging=TapeAndReel, Part Number=B520C-13-F, Part Status=Active, partid=1720, price=0.16, series=-, Speed="Fast Recovery =< 500ns, > 200mA (Io)", Supplier 1=DigiKey
FB1: library part BLM15PE300SH1D, "FERRITE BEAD 30 OHM 0402 1LN", Current Rating (Max)=2.3A, DC Resistance (DCR) (Max)=35mOhm, Device Package="0402 (1005 Metric)", manufacturer="Murata Electronics", Operating Temperature="-55°C ~ 125°C", Ratings=AEC-Q200, Supplier Part Number 1=490-BLM15PE300SH1DCT-ND, ComponentLink1Description=Datasheet, ComponentLink1URL=https://www.murata.com/products/productdata/8796743696414/QNFA9103.pdf, ComponentLink2Description="DigiKey Link", ComponentLink2URL=https://www.digikey.com/en/products/detail/murata-electronics/BLM15PE300SH1D/14012391, Filter Type="Power Line", Height (Max)="0.022\" (0.55mm)", Impedance @ Frequency="30 Ohms @ 100 MHz", lastupdated="11/03/2024 7:42:36 AM", Lifecycle Status=Active, Minimum Order=1, Mounting Type="Surface Mount", Number of Lines=1, Package / Case="0402 (1005 Metric)", packaging=TapeAndReel, Part Number=BLM15PE300SH1D, Part Status=Active, partid=2564, price=0.07, series=BLM, Size / Dimension="0.039\" L x 0.020\" W (1.00mm x 0.50mm)", Supplier 1=DigiKey
J1: "CONN UMCC JACK STR 50OHM SMD", Frequency - Max="6 GHz", Housing Color=Ivory, manufacturer="TE Connectivity AMP Connectors", Supplier Part Number 1=A118077CT-ND, ComponentLink1Description=Datasheet, ComponentLink1URL=https://www.te.com/commerce/DocumentDelivery/DDEController?Action=srchrtrv&DocNm=1909763&DocType=Customer+Drawing&DocLang=English, ComponentLink2Description="DigiKey Link", ComponentLink2URL=https://www.digikey.com/en/products/detail/te-connectivity-amp-connectors/1909763-1/4731728, Connector Style="U.FL (UMCC)", Connector Type="Jack, Male Pin", Contact Termination=Solder, Fastening Type=Snap-On, Impedance=50Ohm, lastupdated="29/06/2022 6:17:07 PM", Lifecycle Status=Active, Minimum Order=1, Mounting Type="Surface Mount", Number of Ports=1, packaging=TapeAndReel, Part Number=1909763-1, Part Status=Active, price=0.23, series=-, Shield Termination=Solder, Supplier 1=DigiKey
J2 J3 J5: "No Description Available", Mfr_Name=JST, RefDes=RefDes, Type=Type
J4: "No Description Available", Mfr_Name=Hirose, RefDes=RefDes, Type=Type
J6: "CONN HEADER SMD R/A 2POS 2MM", Current Rating (Amps)=2A, Insulation Color=Natural, manufacturer="JST Sales America Inc.", Material Flammability Rating="UL94 V-0", Operating Temperature="-25°C ~ 85°C", Supplier Part Number 1=455-1749-1-ND, Voltage Rating=100V, ComponentLink1Description=Datasheet, ComponentLink1URL=http://www.jst-mfg.com/product/pdf/eng/ePH.pdf, ComponentLink2Description="DigiKey Link", ComponentLink2URL=http://digikey.com/product-detail/en/jst-sales-america-inc/S2B-PH-SM4-TB-LF-SN/455-1749-1-ND/926846, Connector Type=Header, Contact Finish - Mating=Tin, Contact Finish - Post=Tin, Contact Length - Mating="0.130\" (3.30mm)", Contact Material="Copper Alloy", Contact Shape=Square, Contact Type="Male Pin", Fastening Type="Detent Lock", Features="Solder Retention", Insulation Height="0.217\" (5.51mm)", Insulation Material="Polyamide (PA6T), Nylon 6T", lastupdated="15/01/2020 3:45:11 AM", Lifecycle Status=Active, Minimum Order=1, Mounting Type="Surface Mount, Right Angle", Number of Positions=2, Number of Positions Loaded=All, Number of Rows=1, packaging=TapeAndReel, Part Number=S2B-PH-SM4-TB(LF)(SN), Part Status=Active, partid=115, Pitch - Mating="0.079\" (2.00mm)", price=0.27, series=PH, Shrouding="Shrouded - 4 Wall", Style="Board to Cable/Wire", Supplier 1=DigiKey, Termination=Solder
J7: "9 Position D-Type, Micro-D Receptacle, Female Sockets Connector", Mfr_Name="Norcomp Inc.", RefDes=RefDes, Type=Type
J8: "CONN HDR 6POS 0.079 GOLD SMD", Current Rating (Amps)=2A, Insulation Color=Black, manufacturer="Sullins Connector Solutions", Material Flammability Rating="UL94 V-0", Operating Temperature="-40°C ~ 105°C", Supplier Part Number 1=S5902-06-ND, ComponentLink1Description=Datasheet, ComponentLink1URL=https://drawings-pdf.s3.amazonaws.com/10489.pdf, ComponentLink2Description="DigiKey Link", ComponentLink2URL=https://www.digikey.com/en/products/detail/sullins-connector-solutions/NPPN061BFLD-RC/807233, Connector Type=Header, Contact Finish - Mating=Gold, Contact Finish - Post=Gold, Contact Finish Thickness - Mating=Flash, Contact Type="Female Socket", Fastening Type=Push-Pull, Insulation Height="0.181\" (4.60mm)", lastupdated="21/06/2022 3:41:40 PM", Lifecycle Status=Active, Minimum Order=1, Mounting Type="Surface Mount", Number of Positions=6, Number of Positions Loaded=All, Number of Rows=1, packaging=Tube, Part Number=NPPN061BFLD-RC, Part Status=Active, Pitch - Mating="0.079\" (2.00mm)", price=0.45, series=-, Style="Board to Board", Supplier 1=DigiKey, Termination=Solder
J9 J10: "CONN HDR 10POS 0.079 GOLD PCB", Current Rating (Amps)=2A, Insulation Color=Black, manufacturer="Sullins Connector Solutions", Material Flammability Rating="UL94 V-0", Operating Temperature="-40°C ~ 105°C", Supplier Part Number 1=S5751-10-ND, ComponentLink1Description=Datasheet, ComponentLink1URL=https://drawings-pdf.s3.amazonaws.com/10483.pdf, ComponentLink2Description="DigiKey Link", ComponentLink2URL=https://www.digikey.com/en/products/detail/sullins-connector-solutions/NPPN101BFCN-RC/804812, Connector Type=Header, Contact Finish - Mating=Gold, Contact Finish - Post=Gold, Contact Finish Thickness - Mating=Flash, Contact Length - Post="0.094\" (2.40mm)", Contact Type="Female Socket", Fastening Type=Push-Pull, Insulation Height="0.173\" (4.40mm)", lastupdated="21/06/2022 2:44:28 PM", Lifecycle Status=Active, Minimum Order=1, Mounting Type="Through Hole", Number of Positions=10, Number of Positions Loaded=All, Number of Rows=1, packaging=Tube, Part Number=NPPN101BFCN-RC, Part Status=Active, Pitch - Mating="0.079\" (2.00mm)", price=0.49, series=-, Style="Board to Board", Supplier 1=DigiKey, Termination=Solder
L1: library part LQM2MPN1R0NG0L, "FIXED IND 1UH 1.4A 107 MOHM SMD", Current Rating (Amps)="1.4 A", DC Resistance (DCR)="107mOhm Max", Device Package="0806 (2016 Metric)", Frequency - Self Resonant=60MHz, Inductance Frequency - Test="1 MHz", manufacturer="Murata Electronics", Operating Temperature="-55°C ~ 125°C", Supplier Part Number 1=490-7784-1-ND, Tolerance=±30%, ComponentLink1Description=Datasheet, ComponentLink1URL=https://search.murata.co.jp/Ceramy/image/img/P02/JELF243B-0022.pdf, ComponentLink2Description="DigiKey Link", ComponentLink2URL=https://www.digikey.com/en/products/detail/murata-electronics/LQM2MPN1R0NG0L/4358097, Height - Seated (Max)="0.039\" (1.00mm)", Inductance="1 µH", lastupdated="11/03/2024 8:03:14 AM", Lifecycle Status=Active, Material - Core=Ferrite, Minimum Order=1, Mounting Type="Surface Mount", Package / Case="0806 (2016 Metric)", packaging=TapeAndReel, Part Number=LQM2MPN1R0NG0L, Part Status=Active, partid=3771, price=0.07, series=LQM2, Shielding=Shielded, Size / Dimension="0.079\" L x 0.063\" W (2.00mm x 1.60mm)", Supplier 1=DigiKey, Supplier Device Package="0806 (2016 Metric)", Type=Multilayer
R1 R2 R3 R4 R5 R6 R7 R11 R12: library part RP73PF1E10KBTD, "RES 10K OHM 0.1% 1/10W 0402", Device Package="0402 (1005 Metric)", manufacturer="TE Connectivity Passive Product", Operating Temperature="-55°C ~ 155°C", Power (Watts)="0.1W, 1/10W", Resistance="10 kOhms", Supplier Device Package=0402, Supplier Part Number 1=A127415CT-ND, Temperature Coefficient=±25ppm/°C, Tolerance=±0.1%, ComponentLink1Description=Datasheet, ComponentLink1URL=https://www.te.com/commerce/DocumentDelivery/DDEController?Action=srchrtrv&DocNm=1773272&DocType=DS&DocLang=English, ComponentLink2Description="DigiKey Link", ComponentLink2URL=https://www.digikey.com/en/products/detail/te-connectivity-passive-product/RP73PF1E10KBTD/8260957, Composition="Thin Film", Height - Seated (Max)="0.014\" (0.35mm)", lastupdated="9/02/2024 8:30:24 PM", Lifecycle Status=Active, Minimum Order=1, Number of Terminations=2, Package / Case="0402 (1005 Metric)", packaging=TapeAndReel, Part Number=RP73PF1E10KBTD, Part Status=Active, partid=2434, price=0.08, series="RP73, Holsworthy", Size / Dimension="0.039\" L x 0.020\" W (1.00mm x 0.50mm)", Supplier 1=DigiKey
R8: library part SR0402JR-7W10RP, "TOTAL LEAD-FREE CHIP RESISTOR SU", Device Package="0402 (1005 Metric)", manufacturer=Yageo, Operating Temperature="-55°C ~ 155°C", Power (Watts)="0.125W, 1/8W", Ratings=AEC-Q200, Supplier Device Package=0402, Supplier Part Number 1=13-SR0402JR-7W10RPCT-ND, Temperature Coefficient=±200ppm/°C, Tolerance=±5%, ComponentLink1Description=Datasheet, ComponentLink1URL=https://www.yageo.com/upload/media/product/productsearch/datasheet/rchip/PYu-SR_D_F%20tol_RoHS_L_5.pdf, ComponentLink2Description="DigiKey Link", ComponentLink2URL=https://www.digikey.com/en/products/detail/yageo/SR0402JR-7W10RP/15220089, Composition="Thick Film", Features="Automotive AEC-Q200, Pulse Withstanding", Height - Seated (Max)="0.016\" (0.40mm)", lastupdated="9/02/2024 8:28:48 PM", Lifecycle Status=Active, Minimum Order=1, Number of Terminations=2, Package / Case="0402 (1005 Metric)", packaging=TapeAndReel, Part Number=SR0402JR-7W10RP, Part Status=Active, partid=68859, price=0.11, Resistance="10 Ohms", series=SR, Size / Dimension="0.039\" L x 0.020\" W (1.00mm x 0.50mm)", Supplier 1=DigiKey
R9: library part CRCW0402511KFKED, "RES SMD 511K OHM 1% 1/16W 0402", Device Package="0402 (1005 Metric)", manufacturer="Vishay Dale", Operating Temperature="-55°C ~ 155°C", Power (Watts)="0.063W, 1/16W", Ratings=AEC-Q200, Supplier Device Package=0402, Supplier Part Number 1=541-511KLCT-ND, Temperature Coefficient=±100ppm/°C, Tolerance=±1%, ComponentLink1Description=Datasheet, ComponentLink1URL=http://www.vishay.com/docs/20035/dcrcwe3.pdf, ComponentLink2Description="DigiKey Link", ComponentLink2URL=https://www.digikey.com/en/products/detail/vishay-dale/CRCW0402511KFKED/1178316, Composition="Thick Film", Features="Automotive AEC-Q200", Height - Seated (Max)="0.016\" (0.40mm)", lastupdated="9/02/2024 8:29:43 PM", Lifecycle Status=Active, Minimum Order=1, Number of Terminations=2, Package / Case="0402 (1005 Metric)", packaging=TapeAndReel, Part Number=CRCW0402511KFKED, Part Status=Active, partid=14529, price=0.01, Resistance="511 kOhms", series=CRCW, Size / Dimension="0.039\" L x 0.020\" W (1.00mm x 0.50mm)", Supplier 1=DigiKey
R10: library part CRCW040291K0JNED, "RES SMD 91K OHM 5% 1/16W 0402", Device Package="0402 (1005 Metric)", manufacturer="Vishay Dale", Operating Temperature="-55°C ~ 155°C", Power (Watts)="0.063W, 1/16W", Ratings=AEC-Q200, Supplier Device Package=0402, Supplier Part Number 1=541-91KJCT-ND, Temperature Coefficient=±200ppm/°C, Tolerance=±5%, ComponentLink1Description=Datasheet, ComponentLink1URL=http://www.vishay.com/docs/20035/dcrcwe3.pdf, ComponentLink2Description="DigiKey Link", ComponentLink2URL=https://www.digikey.com/en/products/detail/vishay-dale/CRCW040291K0JNED/1177615, Composition="Thick Film", Features="Automotive AEC-Q200", Height - Seated (Max)="0.016\" (0.40mm)", lastupdated="9/02/2024 8:29:47 PM", Lifecycle Status=Active, Minimum Order=1, Number of Terminations=2, Package / Case="0402 (1005 Metric)", packaging=CutTape, Part Number=CRCW040291K0JNED, Part Status=Active, partid=13058, price=0.01, Resistance="91 kOhms", series=CRCW, Size / Dimension="0.039\" L x 0.020\" W (1.00mm x 0.50mm)", Supplier 1=DigiKey
R13 R14: library part CRCW02014K70FKED, "RES SMD 4.7K OHM 1% 1/20W 0201", Device Package="0201 (0603 Metric)", manufacturer="Vishay Dale", Operating Temperature="-55°C ~ 155°C", Power (Watts)="0.05W, 1/20W", Resistance="4.7 kOhms", Supplier Device Package=0201, Supplier Part Number 1=541-4.70KAABCT-ND, Temperature Coefficient=±100ppm/°C, Tolerance=±1%, ComponentLink1Description=Datasheet, ComponentLink1URL=http://www.vishay.com/docs/20052/crcw0201e3.pdf, ComponentLink2Description="DigiKey Link", ComponentLink2URL=https://www.digikey.com/en/products/detail/vishay-dale/CRCW02014K70FKED/1968069, Composition="Thick Film", Height - Seated (Max)="0.010\" (0.26mm)", lastupdated="11/03/2024 7:14:07 AM", Lifecycle Status=Active, Minimum Order=1, Number of Terminations=2, Package / Case="0201 (0603 Metric)", packaging=TapeAndReel, Part Number=CRCW02014K70FKED, Part Status=Active, partid=37, price=0.02, series=CRCW, Size / Dimension="0.024\" L x 0.012\" W (0.60mm x 0.30mm)", Supplier 1=DigiKey
U1 U3: "No Description Available", Mfr_Name=STMicroelectronics, RefDes=RefDes, Type=Type
U2: "No Description Available", Mfr_Name="Wurth Electronics", RefDes=RefDes, Type=Type
U4: library part U_NEO-M9N-00B, "*", Mfr_Name=Ublox, RefDes=RefDes, Type=Type
U5: "Non-Isolated PoL Module DC DC Converter 1 Output 1.2 ~ 5.3V 2A 1.6V - 5.5V Input", Mfr_Name="Texas Instruments", RefDes=RefDes, Type=Type
U6 U8: "No Description Available", Mfr_Name="Texas Instruments", RefDes=RefDes, Type=Type
U7: "Humidity, Pressure, Temperature 0 ~ 100% RH I2C, SPI ±3% 1 s Surface Mount", Package=None, Availability=Unavailable, MP=BME280, price=None
Y1: library part CM8V-T1A-32.768KHZ-12.5PF-20PPM-TB-QA, "CRYSTAL 32.7680KHZ 12.5PF SMD", ESR (Equivalent Series Resistance)="70 kOhms", Frequency Tolerance=±20ppm, Load Capacitance=12.5pF, manufacturer="Micro Crystal AG", Operating Mode=Fundamental, Operating Temperature="-40°C ~ 125°C", Package / Case="2-SMD, No Lead", Ratings=AEC-Q200, Supplier Part Number 1=2195-CM8V-T1A-32.768KHZ-12.5PF-20PPM-TB-QACT-ND, ComponentLink1Description=Datasheet, ComponentLink1URL=https://www.microcrystal.com/fileadmin/Media/Products/32kHz/Datasheet/CM8V-T1A.pdf, ComponentLink2Description="DigiKey Link", ComponentLink2URL=https://www.digikey.com/en/products/detail/micro-crystal-ag/CM8V-T1A-32-768KHZ-12-5PF-20PPM-TB-QA/10499237, Frequency="32.768 kHz", Height - Seated (Max)="0.024\" (0.60mm)", lastupdated="11/03/2024 8:14:55 AM", Lifecycle Status=Active, Minimum Order=1, Mounting Type="Surface Mount", packaging=TapeAndReel, Part Number=CM8V-T1A-32.768KHZ-12.5PF-20PPM-TB-QA, Part Status=Active, partid=839, price=0.32, series=CM8V, Size / Dimension="0.079\" L x 0.047\" W (2.00mm x 1.20mm)", Supplier 1=DigiKey, Type="kHz Crystal (Tuning Fork)"
Y2: library part ABLS-25.000MHZ-K4F-T, "CRYSTAL 25.0000MHZ 18PF SMD", ESR (Equivalent Series Resistance)="40 Ohms", Frequency Stability=±50ppm, Frequency Tolerance=±30ppm, Load Capacitance=18pF, manufacturer="Abracon LLC", Operating Mode=Fundamental, Operating Temperature="-40°C ~ 125°C", Package / Case=HC-49/US, Supplier Part Number 1=535-9956-1-ND, ComponentLink1Description=Datasheet, ComponentLink1URL=https://abracon.com/Resonators/abls.pdf, ComponentLink2Description="DigiKey Link", ComponentLink2URL=https://www.digikey.com/en/products/detail/abracon-llc/ABLS-25-000MHZ-K4F-T/2001323, Frequency="25 MHz", Height - Seated (Max)="0.165\" (4.20mm)", lastupdated="11/03/2024 7:54:13 AM", Lifecycle Status=Active, Minimum Order=1, Mounting Type="Surface Mount", packaging=TapeAndReel, Part Number=ABLS-25.000MHZ-K4F-T, Part Status=Active, partid=244, price=0.20, series=ABLS, Size / Dimension="0.449\" L x 0.185\" W (11.40mm x 4.70mm)", Supplier 1=DigiKey, Type="MHz Crystal"

## Via types
v1: diameter 1.27, hole 0.711, Ground to Power2, 10 vias

## Nets (pads, with @x,y where several pads share a name; then routed paths per layer and width w, separated by ;. In a path a pad name is that pad's centre, name@x,y a point inside that pad or via, vN(x,y) a via of type N, cw(c..) or ccw(c..) an arc to the next point about the centre after c; other vN are vias at no path point)
3V3: C6.2 C7.2 C9.2 C10.2 U1.1 U1.9 U1.24 U1.36 U1.48 | length 2
  Ground w0.254: 38.379,52.379 38.633,52.379 38.754,52.5 C10.2 C9.2
+1V8: C25.2 C26.2 C27.1 R13.2 R14.2 U7.2 U7.6 U7.8 U8.3 U8.6 | length 4
  Ground w0.254: R14.2 23.126,12.75 23.275,12.899 U7.2 ; C26.2 22.49,16.445 22.625,16.31 U7.6
+3V3: C11.1 C12.2 C13.2 C16.2 C18.2 C20.2 C21.2 C22.2 C28.1 C29.2 C30.2 C31.2 J2.1 J3.1 J4.4 J5.1 J8.4 J9.1 J10.4 R1.1 R2.1 R4.1 R5.1 R6.1 R7.1 R9.2 U3.1 U3.3 U3.7 U3.8 U3.13 U3.22 U3.23 U4.23 U5.1 U8.7 | length 3.2
  Ground w0.254: v1(76.775,69.8) 76.787,69.812 78.587,69.812 78.6,69.825
  Power2 w0.254: C22.2@75.437,69.837 C22.2 75.437,69.812 76.763,69.812 v1(76.775,69.8)
A/G_INT1: U1.32 U3.11
A/G_INT2: U1.33 U3.12
BOOT0: R3.1 U1.44
CS_SDCARD: U1.38
CS_XBEE: J10.7 U1.14
GND: C1.1 C2.1 C3.1 C4.1 C5.1 C6.1 C7.1 C8.1 C9.1 C10.1 C11.2 C12.1 C13.1 C14.1 C15.1 C16.1 C17.1 C18.1 C19.1 C20.1 C21.1 C22.1 C23.1 C24.1 C25.1 C26.1 C27.2 C28.2 C29.1 C30.1 C31.1 J1.G J2.4 J3.4 J4.6 J4.10 J4.11 J4.12 J4.13 J5.4 J6.1 J7.5 J8.6 J9.10 R3.2 R10.1 R12.1 U1.8 U1.23 U1.35 U1.47 U1.49 U2.2 U3.14 U3.15 U3.16 U3.17 U3.18 U3.19 U3.20 U4.2 U4.10 U4.12 U4.13 U4.24 U5.6 U5.7 U6.B2 U6.C1 U7.1 U7.5 U7.7 U8.2 | length 10.4
  Ground w0.254: C26.1 21.61,16.674 U7.5@21.876,16.408 ; U7.5@21.877,16.408 21.975,16.31 U7.5 ; U7.7 23.373,16.388 23.373,16.537 23.51,16.674 C25.1 ; 38.379,51.879 38.633,51.879 38.893,51.62 C10.1 C9.1 ; v1(74.489,68.372) 74.566,68.45 76.725,68.45 77.321,67.854 78.371,67.854 78.6,67.625
  Power2 w0.254: v1(74.489,68.372) 74.517,68.4 74.517,69.797 C22.1
GPS_Antenna: FB1.2 J1.S U4.11
GPS_INT: U1.27 U4.4
GPS_PPS: U1.26 U4.3
GPS_RST: R4.2 U1.28 U4.8
GPS_SAFEBOOT: R5.2 U1.25 U4.1
MAG_DRDY: U1.31 U3.9
MAG_INT: U1.34 U3.10
MISO: J4.7 J9.4 U1.16
MOSI: J4.3 J10.1 U1.17
NetC1_2: C1.2 U1.3 Y1.2
NetC2_2: C2.2 U1.4 Y1.1
NetC3_2: C3.2 U1.5 Y2.2
NetC4_2: C4.2 U1.22
NetC8_2: C8.2 Y2.1
NetC14_2: C14.2 U3.24
NetC15_2: C15.2 U3.21
NetC17_2: C17.2 FB1.1 R8.1
NetC23_2: C23.2 R11.2 U6.B3
NetD1_1: D1.1 J6.2
NetL1_1: L1.1 U5.3
NetL1_2: L1.2 U5.2
NetR6_2: R6.2 U3.6
NetR7_2: R7.2 U3.5
NetR9_1: R9.1 R10.2 U5.8
NetR11_1: R11.1 U6.A1
NetR12_2: R12.2 U6.B1
NRST: C5.2 U1.7 U2.3
PA0: U1.10
PA1: U1.11
PA2: U1.12
PA3: U1.13
PA8: U1.29
PA9: U1.30
PA14: U1.37
PACK+: C24.2 D1.2 U6.C3
PB0: U1.18
PB1: U1.19
PB2: U1.20
PB3: U1.39
PB4: U1.40
PB5: U1.41
PB10: U1.21
SCL: J2.3 J3.3 J5.3 R1.2 U1.45 U3.2 U4.19 U8.8 | length 88.5
  Ground w0.254: J3.3 15.025,70.199 16.199,69.025 v1(34.675,69.025) ; R1.2 28.437,46.587 28.437,48.188 v1(28.5,48.25) ; R1.2@28.45,46.525 29.825,47.9 U1.45 ; v1(31.769,54.703) 33.725,54.703 v1(33.781,54.647) ; J2.3 34.675,74.725 v1(34.675,69.025) ; J5.3 55.525,69.324 55.226,69.025 v1(34.675,69.025)
  Power w0.254: v1(28.5,48.25) 28.5,54.075 29.128,54.703 v1(31.769,54.703) ; v1(33.781,54.647) 33.781,68.181 34.625,69.025 v1(34.675,69.025)
SCL_1V8: R14.1 U6.A3 U7.4 U8.5 | length 1
  Ground w0.254: R14.1 21.962,13.413 21.962,14.338 U7.4
SCLK: J4.5 J10.8 U1.15
SDA: J2.2 J3.2 J5.2 R2.2 U1.46 U3.4 U4.18 U8.1 | length 83.6
  Ground w0.254: v1(12.95,70.825) 12.95,74.675 J3.2 ; R2.2 30.275,45.125 30,45.4 v1(30,46.55) 30,46.792 30.608,47.4 U1.46 ; v1(32.75,70.808) 32.775,70.833 J2.2 ; v1(53.525,70.75) J5.2
  Power w0.254: v1(12.95,70.825) 12.958,70.817 32.741,70.817 v1(32.75,70.808) ; v1(30,46.55) 30,46.782 29.575,47.207 29.575,53.478 29.774,53.677 32.601,53.677 32.75,53.826 v1(32.75,70.808) ; v1(53.525,70.75) 53.496,70.779 32.779,70.779 v1(32.75,70.808)
SDA_1V8: R13.1 U6.A2 U7.3 U8.4 | length 0.7
  Ground w0.254: 22.573,14.05 22.573,13.671 22.65,13.594 R13.1
SS_SDCARD: J4.2
UART_RX: J7.3 U1.43
UART_TX: J7.2 U1.42
VBAT+: C19.2 U5.4 U5.5 U6.C2 | length 1.6
  Ground w0.254: U5.4 U5.5
"VCC _RF": R8.2 U4.9
XB_PROG_DTR: J8.1
XB_PROG_RTS: J8.5
XB_PROG_RX: J8.3
XB_PROG_TX: J8.2
pads on no net: J2.5 J2.6 J3.5 J3.6 J4.1 J4.8 J4.9 J5.5 J5.6 J6.M J7.1 J7.4 J7.6 J7.7 J7.8 J7.9 J7.10 J7.11 J9.2 J9.3 J9.5 J9.6 J9.7 J9.8 J9.9 J10.2 J10.3 J10.5 J10.6 J10.9 J10.10 U1.2 U1.6 U2.1 U2.4 U4.5 U4.6 U4.7 U4.14 U4.15 U4.16 U4.17 U4.20 U4.21 U4.22

## Other copper
Multi-Layer:
  the board outline again, w0.254

## Text inside footprints (layer, text, board x,y; h text height)
J4: Top Overlay "*" at 79.235,68.288 h1.27 r90; Mechanical 13 "*" at 79.235,68.288 h1.27 r90
U1: Top Overlay "*" at 32.485,44.337 h1.27 r90; Mechanical 13 "*" at 32.485,45.785 h1.27 r90
U2: Top Overlay "*" at 50.32,57.29 h1.27 r180; Mechanical 13 "*" at 48.935,58.814 h1.27 r180
U3: Top Overlay "*" at 28.505,61.175 h1.27 r180; Mechanical 13 "*" at 27.216,61.175 h1.27 r180
U6: Top Overlay "A" at 12.855,9.665 h1.27; Top Overlay "C" at 12.855,8.665 h1.27; Top Overlay "1" at 15.725,11.125 h1.27 r90; Top Overlay "3" at 15.687,11.705 h1.27 r90; Mechanical 13 "A" at 12.855,9.665 h1.27; Mechanical 13 "C" at 12.855,8.665 h1.27; Mechanical 13 "1" at 15.725,11.125 h1.27 r90; Mechanical 13 "3" at 15.687,11.705 h1.27 r90; Bottom Overlay "A" at 13.7,9.675 h1.27; Bottom Overlay "C" at 13.7,8.65 h1.27; Bottom Overlay "1" at 15.725,11.125 h1.27 r90; Bottom Overlay "3" at 14.417,11.705 h1.27 r270
U8: Top Overlay "*" at 20.004,10.402 h1.27; Mechanical 13 "*" at 20.004,10.402 h1.27